# EAGLE board Genius (EAGLE 9.7.0)

Size 202.63 x 93.94 mm. Coordinates in mm from the lower left corner, seen from the top.
Outline: 0,0 202.63,0 202.63,93.94 0,93.94 0,0
Copper layers (1*16): Top 0.035mm / dielectric 1.5mm / Bottom 0.035mm
Design rules "default": minimum track width 6mil, minimum drill 0.35mm, track to track 6mil, track to pad 6mil, pad to pad 6mil, via to via 6mil, smd to smd 6mil, copper to edge 40mil, drill to drill 6mil, minimum pad ring 10mil, minimum via ring 8mil, stop-mask expansion 4mil, vias tented up to drill 0mil, thermal gap 10mil

## Footprints (pad centres in the part's own frame; a part is rotated, then mirrored left to right if it is on the bottom)
LEDRD254W60D565H860B_B = drill 0.981 pad 1.581: 1 -1.27,0; 2 1.27,0
LEDRD254W60D565H860B_G = drill 0.981 pad 1.581: 1 -1.27,0; 2 1.27,0
LEDRD254W60D565H860B = drill 0.981 pad 1.581: 1 -1.27,0; 2 1.27,0
LEDRD254W60D565H860B_Y = drill 0.981 pad 1.581: 1 -1.27,0; 2 1.27,0
PIEZO = drill 1 pad 1.6: 1 -3.5,0; 2 3.5,0
RESAD1016W63L850D250B = drill 0.83 pad 1.43: 1 -5.08,0; 2 5.08,0
SWITCH-MOMENTARY-PTH-6.5MM = drill 1.016 pad 1.88: 1 -3.251,2.261; 2 3.251,2.261; 3 -3.251,-2.261; 4 3.251,-2.261
ARDUINO-UNO-R3-SHIELD = drill 1.016 pad 1.88: 3.3V 24.13,-2.54; 5V 24.13,0; A0 24.13,12.7; A1 24.13,15.24; A2 24.13,17.78; A3 24.13,20.32; A4 24.13,22.86; A5 24.13,25.4; AREF -24.13,-13.97; D2 -24.13,20.32; D3 -24.13,17.78; D4 -24.13,15.24; D5 -24.13,12.7; D6 -24.13,10.16; D7 -24.13,7.62; D8 -24.13,3.81; D9 -24.13,1.27; D10 -24.13,-1.27; D11 -24.13,-3.81; D12 -24.13,-6.35; D13 -24.13,-8.89; GND@0 24.13,2.54; GND@1 24.13,5.08; GND@2 -24.13,-11.43; IOREF 24.13,-7.62; NC 24.13,-10.16; RES 24.13,-5.08; RX -24.13,25.4; SCL -24.13,-19.05; SDA -24.13,-16.51; TX -24.13,22.86; VIN 24.13,7.62

## Placement (x,y rotation side)
DBLUE_LED  BLUE  [LEDRD254W60D565H860B_B]  162.92,35.56 180 top
DGREEN_LED  GREEN  [LEDRD254W60D565H860B_G]  150.22,43.18 0 top
DRED_LED  RED  [LEDRD254W60D565H860B]  162.92,43.18 180 top
DYELLOW_LED  YELLOW  [LEDRD254W60D565H860B_Y]  150.22,35.56 0 top
PIEZO2  PIEZO  [PIEZO]  190.9,80.36 0 top
R1  100  [RESAD1016W63L850D250B]  128.76,6.33 180 top
R2  100  [RESAD1016W63L850D250B]  128.72,9.43 180 top
R3  100  [RESAD1016W63L850D250B]  130.36,70.86 180 top
R4  100  [RESAD1016W63L850D250B]  130.2,73.89 180 top
R5  1k  [RESAD1016W63L850D250B]  169.27,58.42 90 top
R6  1k  [RESAD1016W63L850D250B]  138.79,58.42 90 top
R7  1k  [RESAD1016W63L850D250B]  169.27,22.86 90 top
R8  1k  [RESAD1016W63L850D250B]  138.79,22.86 90 top
R9  1k  [RESAD1016W63L850D250B]  88.8,58.42 90 top
SBLUE_BUTTON  SWITCH_MOMENTARY  [SWITCH-MOMENTARY-PTH-6.5MM]  171.81,31.75 90 top
SGREEN_BUTTON  SWITCH_MOMENTARY  [SWITCH-MOMENTARY-PTH-6.5MM]  141.33,46.99 90 top
SRED_BUTTON  SWITCH_MOMENTARY  [SWITCH-MOMENTARY-PTH-6.5MM]  171.81,46.99 90 top
SSTART_GAME  SWITCH_MOMENTARY  [SWITCH-MOMENTARY-PTH-6.5MM]  84.99,50.8 0 top
SYELLOW_BUTTON  SWITCH_MOMENTARY  [SWITCH-MOMENTARY-PTH-6.5MM]  141.33,31.75 90 top
U1  ARDUINO-UNO-R3-SHIELD  [ARDUINO-UNO-R3-SHIELD]  47.88,39.75 270 top

## Library data of the parts
DBLUE_LED = Tinkercad; CATEGORY: Opto-Electronic; SUB-CATEGORY: LED; VALUE: LED_BLUE
DGREEN_LED = Tinkercad; CATEGORY: Opto-Electronic; SUB-CATEGORY: LED; VALUE: LED_GREEN
DRED_LED = Tinkercad; CATEGORY: Opto-Electronic; SUB-CATEGORY: LED; VALUE: LED_RED
DYELLOW_LED = Tinkercad; CATEGORY: Opto-Electronic; SUB-CATEGORY: LED; VALUE: LED_YELLOW
PIEZO2 R1-R9 SBLUE_BUTTON SGREEN_BUTTON SRED_BUTTON SSTART_GAME SYELLOW_BUTTON U1 = Tinkercad

## Nets
DBLUE_LED_A: DBLUE_LED.1 R1.1
DGREEN_LED_A: DGREEN_LED.1 R3.1
DRED_LED_A: DRED_LED.1 R4.1
DYELLOW_LED_A: DYELLOW_LED.1 R2.1
U1_5V: SBLUE_BUTTON.3 SBLUE_BUTTON.4 SGREEN_BUTTON.3 SGREEN_BUTTON.4 SRED_BUTTON.3 SRED_BUTTON.4 SSTART_GAME.4 SYELLOW_BUTTON.3 SYELLOW_BUTTON.4 U1.5V
U1_D2: R3.2 U1.D2
U1_D3: R4.2 U1.D3
U1_D4: R2.2 U1.D4
U1_D5: R1.2 U1.D5
U1_D6: R6.1 SGREEN_BUTTON.1 SGREEN_BUTTON.2 U1.D6
U1_D7: R5.1 SRED_BUTTON.1 SRED_BUTTON.2 U1.D7
U1_D8: R8.2 SYELLOW_BUTTON.1 SYELLOW_BUTTON.2 U1.D8
U1_D9: R7.2 SBLUE_BUTTON.1 SBLUE_BUTTON.2 U1.D9
U1_D10: R9.1 SSTART_GAME.1 SSTART_GAME.2 U1.D10
U1_D13: PIEZO2.1 U1.D13
U1_GND: DBLUE_LED.2 DGREEN_LED.2 DRED_LED.2 DYELLOW_LED.2 PIEZO2.2 R5.2 R6.2 R7.1 R8.1 R9.2 U1.GND@0 U1.GND@1 U1.GND@2

## Tracks (layer width: path | path; a pad name or v marks a point on that pad's centre or on a via)
DBLUE_LED_A  (1 unrouted)
DGREEN_LED_A  (1 unrouted)
DRED_LED_A  (1 unrouted)
DYELLOW_LED_A  (1 unrouted)
U1_5V  (9 unrouted)
U1_D2  (1 unrouted)
U1_D3  (1 unrouted)
U1_D4  (1 unrouted)
U1_D5  (1 unrouted)
U1_D6  (3 unrouted)
U1_D7  (3 unrouted)
U1_D8  (3 unrouted)
U1_D9  (3 unrouted)
U1_D10  (3 unrouted)
U1_D13  (1 unrouted)
U1_GND  (12 unrouted)